# Altium PCB Potencia.PcbDoc
Units mm, origin at the board's own origin, x right, y up, seen from the top; angles counter-clockwise.
Board outline 128 x 103 mm, 2 copper layers (Top Layer, Bottom Layer); 32 components, 38 nets, 101 pads, 0 vias.
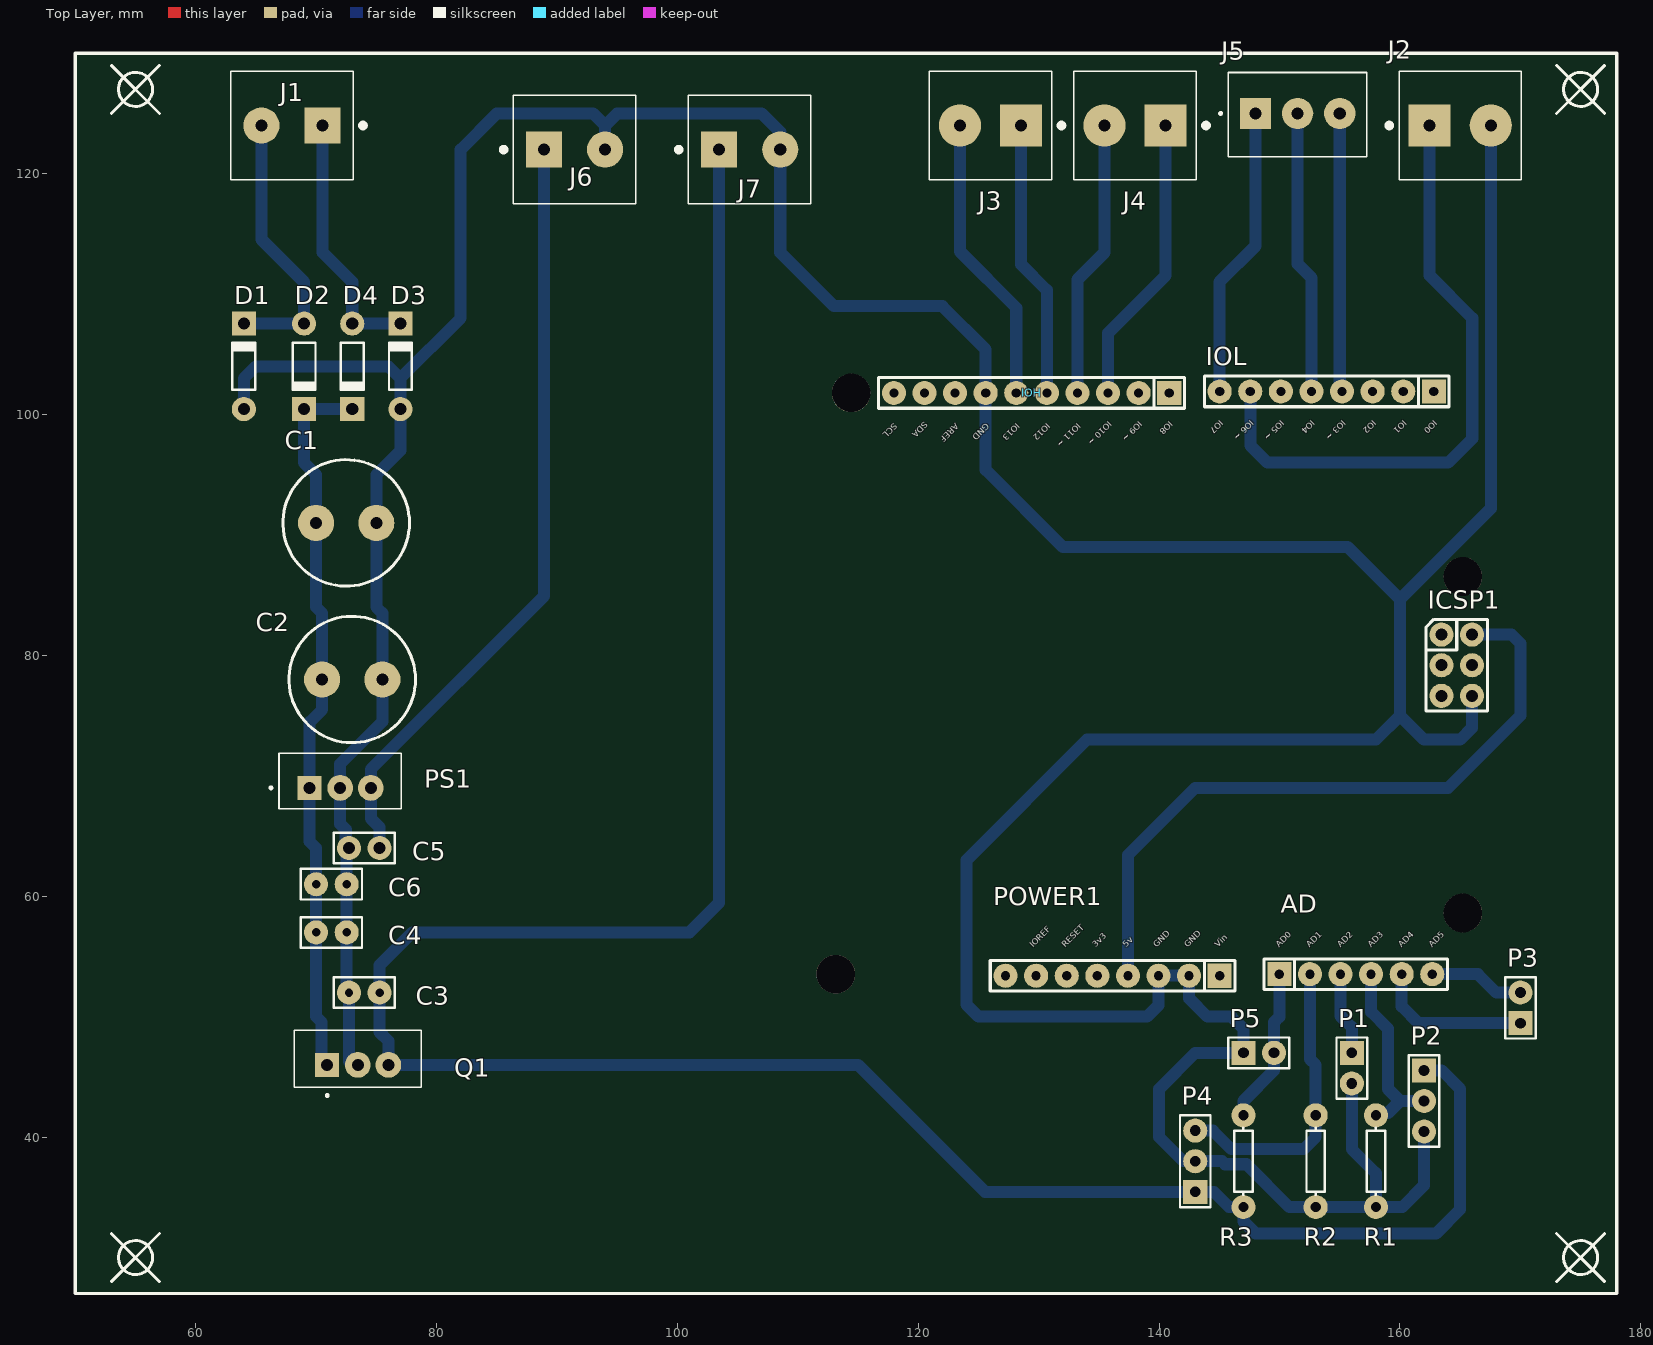
[diagram p0: Top Layer view]
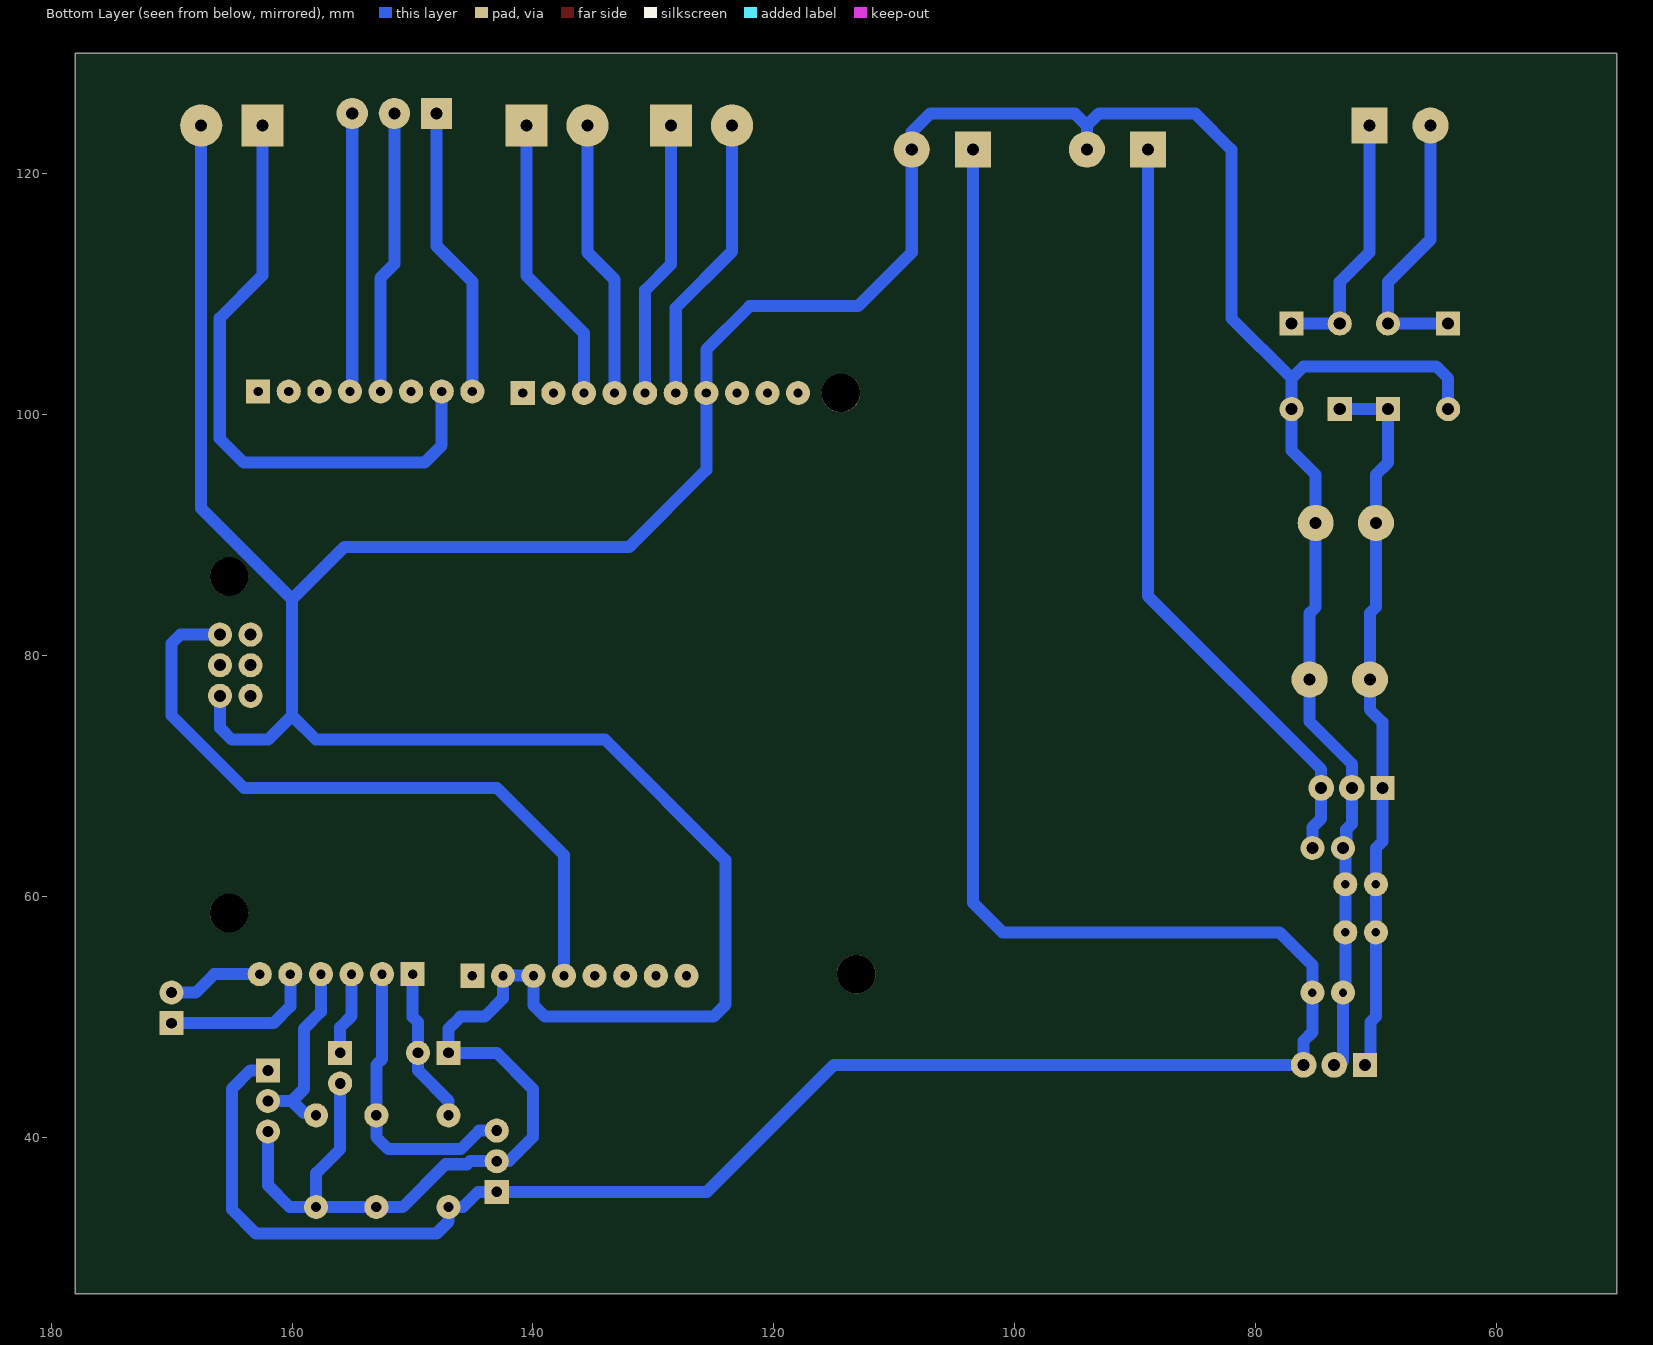
[diagram p1: Bottom Layer view, seen from below]

## Layer stack, top to bottom
Top Solder: solder mask 0.0102, Solder Resist, Dk 3.5
Top Layer: signal copper 0.0356
Dielectric 1: dielectric 0.32, FR-4, Dk 4.8
Bottom Layer: signal copper 0.0356
Bottom Solder: solder mask 0.0102, Solder Resist, Dk 3.5

## Board outline
50,27 178,27 178,130 50,130

## Design rules (kind name [scope] priority, off if disabled: settings)
Clearance [All] p1: gap=0.254 ignorepadtopadclearanceinfootprint=FALSE except(0: Arc-Hole Track-Hole SMDPad-Hole THPad-Hole Via-Hole Fill-Hole Poly-Hole Region-Hole Text-Hole)
PolygonConnect [All] p1: connectstyle=Relief reliefconductorwidth=0.254 reliefentries=4 polygonreliefangle="90 Angle" airgapwidth=0.254
RoutingVias [All] p1: holewidth=0.711 width=1.27 viastyle="Through Hole" minholewidth=0.711 minwidth=1.27 maxholewidth=0.711 maxwidth=1.27
SolderMaskExpansion [All] p1: expansion=0.102
Width [All] p1: maxlimit=1 minlimit=1 preferedwidth=1
30 further rules are at their usual default settings.

## Components (designator, comment, footprint, x,y, rotation, side; value= is the part's Value field where it differs from the comment)
AD "AD" "Header 6x1 8.5mm" 149.982,53.53 r0 top locked
C1 "Cap Pol1" RB5-10.5 72.5,91 r0 top value=100pF
C2 "Cap Pol1" RB5-10.5 73,78 r0 top value=100pF
C3 "Cap" RAD-0.1#1 74,52 r0 top value=100pF
C4 "Cap" RAD-0.1#1 71.27,57 r180 top value=100pF
C5 "Cap" RAD-0.1#2 74,64 r0 top value=100pF
C6 "Cap" RAD-0.1#1 71.27,61 r180 top value=100pF
D1 "Diode 1N914" DO-35 64,104 r90 top
D2 "Diode 1N914" DO-35 69,104 r270 top
D3 "Diode 1N914" DO-35 77,104 r90 top
D4 "Diode 1N914" DO-35 73,104 r270 top
ICSP1 "ICSP" ICSP 163.444,81.724 r0 top
IOH "IOH" "Header 10x1 8.5mm" 140.838,101.79 r180 top locked
IOL "IOL" "Header 8x1 8.5mm" 162.809,101.917 r180 top
J1 "282841-2" TE_282841-2#1 68,124 r180 top
J2 "282841-2" TE_282841-2#2 165,124 r0 top
J3 "282841-2" TE_282841-2#2 126,124 r180 top
J4 "282841-2" TE_282841-2#2 138,124 r180 top
J5 "1776275-3" TE_1776275-3 148,125 r0 top
J6 "282841-2" TE_282841-2#1 91.46,122 r0 top
J7 "282841-2" TE_282841-2#1 106,122 r0 top
P1 "Boton limpieza" HDR1X2 156,47 r270 top
P2 "Fin de carrera A" HDR1X3 162,45.54 r270 top
P3 "I2C" HDR1X2 170,49.46 r90 top
P4 "Fin de carrera B" HDR1X3 143,35.46 r90 top
P5 "Termistor" HDR1X2 147,47 r0 top
POWER1 "POWER_UNO" "Header 8x1 8.5mm" 145.029,53.403 r180 top
PS1 "LM7812" VREG_LM7812 72,69 r0 top
Q1 "LM7805CT/NOPB" TO254P1054X470X1955-3 73.46,46 r0 top
R1 "Res1" AXIAL-0.3 158,38 r90 top value=1K
R2 "Res1" AXIAL-0.3 153,38 r90 top value=1K
R3 "Res1" AXIAL-0.3 147,38 r90 top value=1K

## Footprints (in the part's own frame and the unit in brackets; to place one, negate y for a bottom-side part, rotate by r counter-clockwise, add the part's x,y. Pads: shape width x height; smd on the part's side, far side on the other; paste and mask are expansions set on the pad)
AXIAL-0.3 [mm] "Axial Device, Thru-Hole; 2 Leads; 0.3 in Pin Spacing"
  round 2 hole 0.85: 1(-3.81,0) 2(3.81,0)
  silkscreen extent -2.77,-0.76 2.77,0.76
DO-35 [mm] "Diode, Axial; Body 3.8 x 1.9 mm (LxDia. max), Lead Dia. 0.53 mm (max)"
  round 2 hole 1: 1(-3.55,0)
  rect 2x2 hole 1: 2(3.55,0)
  silkscreen extent -1.95,-0.95 2.05,0.95
HDR1X2 [mm] "Connector; Header; 2 Position"
  rect 2x2 hole 0.9: 1(0,0)
  round 2 hole 0.9: 2(2.54,0)
  silkscreen extent -1.27,-1.27 3.81,1.27
HDR1X3 [mm] "Connector; Header; 3 Position"
  rect 2x2 hole 0.9: 1(0,0)
  round 2 hole 0.9: 2(2.54,0) 3(5.08,0)
  silkscreen extent -1.27,-1.27 6.35,1.27
"Header 6x1 8.5mm" [mm] "Stackable 6 pin header"
  rect 2x2 hole 0.762: 1(0,0)
  round 2 hole 0.762: 2(2.54,0) 3(5.08,0) 4(7.62,0) 5(10.16,0) 6(12.7,0)
  silkscreen extent -1.27,-1.27 13.97,1.27, body extent -1.27,-1.27 13.97,1.27, height 8.5
"Header 8x1 8.5mm" [mm] "Stackable 8 pin header"
  rect 2x2 hole 0.762: 1(0,0)
  round 2 hole 0.762: 2(2.54,0) 3(5.08,0) 4(7.62,0) 5(10.16,0) 6(12.7,0) 7(15.24,0) 8(17.78,0)
  silkscreen extent -1.27,-1.27 19.05,1.27, body extent -1.27,-1.27 19.05,1.27, height 8.5
"Header 10x1 8.5mm" [mm] "Stackable 10 pin header"
  rect 2x2 hole 0.762: 1(0,0)
  round 2 hole 0.762: 2(2.54,0) 3(5.08,0) 4(7.62,0) 5(10.16,0) 6(12.7,0) 7(15.24,0) 8(17.78,0) 9(20.32,0) 10(22.86,0)
  silkscreen extent -1.27,-1.27 24.13,1.27, body extent -1.27,-1.27 24.13,1.27, height 8.5
ICSP [mm]
  round 2 hole 1: 1(0,0) 2(2.54,0) 3(0,-2.54) 4(2.54,-2.54) 5(0,-5.08) 6(2.54,-5.08)
  silkscreen extent -1.27,-6.35 3.81,1.27, body extent -1.27,-6.35 3.81,1.27, height 12.31
RAD-0.1#1 [mm] "Radial Cap, Thru-Hole; 2 Leads; 0.1 in Pin Spacing"
  round 2 hole 0.7: 1(-1.27,0) 2(1.27,0)
  silkscreen extent -2.54,-1.27 2.54,1.27
RAD-0.1#2 [mm] "Radial Cap, Thru-Hole; 2 Leads; 0.1 in Pin Spacing"
  round 2 hole 1: 1(-1.27,0) 2(1.27,0)
  silkscreen extent -2.54,-1.27 2.54,1.27
RB5-10.5 [mm] "Capacitor (Radial); 2 Leads"
  round 3 hole 1: 1(-2.5,0) 2(2.5,0)
  silkscreen extent -5.25,-5.25 5.25,5.25
TE_282841-2#1 [mm]
  rect 3x3 hole 1: 1(-2.54,0)
  round 3 hole 1: 2(2.54,0)
  silkscreen extent -6.09,-4.5 5.08,4.5
TE_282841-2#2 [mm]
  rect 3.5x3.5 hole 1: 1(-2.54,0)
  round 3.5 hole 1: 2(2.54,0)
  silkscreen extent -6.09,-4.5 5.08,4.5
TE_1776275-3 [mm]
  rect 2.6x2.6 hole 1: 1(0,0)
  round 2.6 hole 1: 2(3.5,0) 3(7,0)
  silkscreen extent -3,-3.6 9.25,3.4
TO254P1054X470X1955-3 [mm]
  rect 2x2 hole 1: 1(-2.54,0)
  round 2.14 hole 1: 2(0,0) 3(2.54,0)
  silkscreen extent -5.27,-2.64 5.27,2.86
VREG_LM7812 [mm]
  rect 2x2 hole 1: 1(-2.54,0)
  round 2.14 hole 1: 2(0,0) 3(2.54,0)
  silkscreen extent -5.85,-1.72 5.08,2.86

## Part data
AD: Supplier Part Number 1=2699089, Supplier 1=Arrow, Supplier 2=Digi-Key, Supplier 3=Arrow, Supplier 4=Arrow, Supplier Part Number 2=SAM1198-06-ND, Supplier Part Number 3=2699088, Supplier Part Number 4=2699075
C1 C2: "Polarized Capacitor (Radial)", LatestRevisionDate=17-Jul-2002, LatestRevisionNote="Re-released for DXP Platform.", PackageDescription="Polarized Capacitor (Radial); 2 Leads", PackageReference=RB7.6-15, Published=8-Jun-2000, Publisher="Altium Limited"
C3 C4 C5 C6: "Capacitor", LatestRevisionDate=17-Jul-2002, LatestRevisionNote="Re-released for DXP Platform.", PackageDescription="Radial Cap, Thru-Hole; 2 Leads; 0.3 in Pin Spacing", PackageReference=RAD-0.3, Published=8-Jun-2000, Publisher="Altium Limited"
D1 D2 D3 D4: "High Conductance Fast Diode", Code_JEDEC=DO-204-AH, ComponentLink1Description="Manufacturer Link", ComponentLink1URL=http://www.fairchildsemi.com/, ComponentLink2Description=Datasheet, ComponentLink2URL=http://www.fairchildsemi.com/ds/1N%2F1N4448.pdf, DatasheetVersion=1997, LatestRevisionDate=17-Jul-2002, LatestRevisionNote="Re-released for DXP Platform.", PackageDescription="Diode, Axial; Body 3.8 x 1.9 mm (LxDia. max), Lead Dia. 0.53 mm (max)", PackageReference=DO-35, Published=8-Jun-2000, Publisher="Altium Limited"
ICSP1: Supplier Part Number 1=2699117, Supplier 1=Arrow, Supplier 2=Arrow, Supplier 3=Digi-Key, Supplier 4=Arrow, Supplier 5=Digi-Key, Supplier Part Number 2=2699116, Supplier Part Number 3=SAM1185-06-ND, Supplier Part Number 4=2699091, Supplier Part Number 5=SAM1196-06-ND
IOH: Supplier Part Number 1=2698803S4475693N1004, Supplier 1=Arrow, Supplier 2=Digi-Key, Supplier 3=Arrow, Supplier Part Number 2=SAM1198-10-ND, Supplier Part Number 3=2698789
IOL POWER1: Supplier Part Number 1=SAM1198-08-ND, Supplier 1=Digi-Key, Supplier 2=Arrow, Supplier 3=Arrow, Supplier 4=Arrow, Supplier Part Number 2=2698939, Supplier Part Number 3=2698940, Supplier Part Number 4=2698925
J1 J2 J3 J4 J6 J7: "Conn Terminal Block 2 POS 5.08mm Solder ST Thru-Hole 17.5A/Contact", Package=None, Availability=Unavailable, EU_RoHS_Compliance="Compliant with Exemptions", MF="TE Connectivity", MP=282841-2, Price=None, SnapEDA_Link=https://www.snapeda.com/parts/282841-2/TE%20Connectivity%20AMP%20Connectors/view-part/434231/?ref=snap, TE_purchase_URL=https://www.te.com/usa-en/product-282841-2.html?te_bu=Cor&te_type=disp&te_campaign=seda_glo_cor-seda-global-disp-prtnr-fy19-seda-model-bom-cta_sma-317_1&elqCampaignId=32493
  J1: Comment_1=Transformador
  J2: Comment_1="Cama caliente"
  J3: Comment_1="Motoreductor A"
  J4: Comment_1="Motoreductor B"
  J6: Comment_1="salida de 12"
  J7: Comment_1="Salida 5"
J5: "Wire-To-Board Terminal Block, 3, 250 V, 7 A, 22 Awg, 14 Awg, 2 Mm", Package=None, Availability=Unavailable, Comment_1="Paso a paso", MF="TE Connectivity", MP=1776275-3, Price=None, SnapEDA_Link=https://www.snapeda.com/parts/1776275-3/TE%20Connectivity%20AMP%20Connectors/view-part/2779112/?ref=snap, TE_purchase_URL=https://www.te.com/usa-en/product-1776275-3.html?te_bu=Cor&te_type=disp&te_campaign=seda_glo_cor-seda-global-disp-prtnr-fy19-seda-model-bom-cta_sma-317_1&elqCampaignId=32493
P1 P3 P5: library part "Header 2", "Header, 2-Pin", LatestRevisionDate=17-Jul-2002, LatestRevisionNote="Re-released for DXP Platform.", Publisher="Altium Limited"
P2 P4: library part "Header 3", "Header, 3-Pin", LatestRevisionDate=17-Jul-2002, LatestRevisionNote="Re-released for DXP Platform.", Publisher="Altium Limited"
PS1: "Linear Voltage Regulator IC 1 Output 1.5A DDPAK/TO-263-3", Package="TO-220 Texas Instruments", Availability=Unavailable, BuyPart=https://www.snapeda.com/parts/LM7812/Texas%20Instruments/view-part/2755251/?ref=eda, MF="Texas Instruments", MP=LM7812, Price=None, SnapEDA_Link=https://www.snapeda.com/parts/LM7812/Texas%20Instruments/view-part/2755251/?ref=snap
Q1: "1.5-A, 30-V, linear voltage regulator 3-TO-220 0 to 125", Package="TO-220-3 Texas Instruments", Availability=Unavailable, MF="Texas Instruments", MP=LM7805CT/NOPB, Price=None, SnapEDA_Link=https://www.snapeda.com/parts/LM7805CT/NOPB/Texas%20Instruments/view-part/6627/?ref=snap, Texas_Instruments-Purchase-URL=https://snapeda.com/shop?store=Texas+Instruments&id=6627
R1 R2 R3: "Resistor", LatestRevisionDate=17-Jul-2002, LatestRevisionNote="Re-released for DXP Platform.", PackageDescription="Axial Device, Thru-Hole; 2 Leads; 0.3 in Pin Spacing", PackageReference=AXIAL-0.3, Published=8-Jun-2000, Publisher="Altium Limited"

## Free pads (board coordinates)
  round 3.2 hole 3.2: 0(113.152,53.53) 0(114.422,101.79) 0(165.222,58.61) 0(165.222,86.55)

## Nets (pads, with @x,y where several pads share a name; then routed paths per layer and width w, separated by ;. In a path a pad name is that pad's centre, name@x,y a point inside that pad or via, vN(x,y) a via of type N, cw(c..) or ccw(c..) an arc to the next point about the centre after c; other vN are vias at no path point)
3V3: POWER1.5
5V: ICSP1.2 POWER1.4 | length 57.7
  Bottom Layer w1: POWER1.4 137.409,63.409 143,69 164,69 170,75 170,81 169.276,81.724 ICSP1.2
+5V: C3.2 J7.1 P2.1 P4.1 Q1.3 R3.1 | length 211.4
  Bottom Layer w1: J7.1 103.46,59.46 101,57 78,57 75.27,54.27 C3.2 75.27,48.73 76,48 Q1.3 115,46 125.54,35.46 P4.1 144.54,35.46 145.81,34.19 R3.1 147,33 148,32 163,32 165,34 165,44 163.46,45.54 P2.1
+12V: C5.2 J6.1 PS1.3 | length 64.3
  Bottom Layer w1: C5.2 75.27,65.73 74.54,66.46 PS1.3 74.54,70.54 88.92,84.92 J6.1
AD0: AD.1 P5.2 R3.2 | length 13
  Bottom Layer w1: R3.2 147,43 149.54,45.54 P5.2 149.54,49.54 149.982,49.982 AD.1
AD1: AD.2 P4.3 R2.2 | length 24.8
  Bottom Layer w1: P4.3 144.46,40.54 146,39 152,39 153,40 R2.2 153,46 152.522,46.478 AD.2
AD2: AD.3 P1.1 | length 6.9
  Bottom Layer w1: AD.3 155.062,50.062 156,49.124 P1.1
AD3: AD.4 P2.2 R1.2 | length 16
  Bottom Layer w1: AD.4 157.602,50.398 159,49 159,44 160,43 ; R1.2 158.19,42 159,42 160,43 ; P2.2 160,43
AD4: AD.5 P3.1 | length 13.1
  Bottom Layer w1: AD.5 160.142,50.858 161.54,49.46 P3.1
AD5: AD.6 P3.2 | length 8
  Bottom Layer w1: AD.6 166.47,53.53 168,52 P3.2
AREF: IOH.8
GND: C1.2 C2.2 C3.1 C4.1 C5.1 C6.1 D1.1 D3.1 ICSP1.6 IOH.7 J2.2 J6.2 J7.2 P1.2 P2.3 P4.2 P5.1 POWER1.2 POWER1.3 PS1.2 Q1.2 R1.1 R2.1 | length 407
  Bottom Layer w1: D1.1 64,103 65,104 76,104 77,103 ; Q1.2@73,46 72.73,46.27 C3.1 72.54,52.19 C4.1 C6.1 72.54,63.92 72.46,64 72.46,65.54 72,66 PS1.2 72,71 75.5,74.5 C2.2 75.5,83.5 75,84 C1.2 75,95 77,97 D3.1 77,103 ; J6.2 94,124 ; P1.2 156,39 158,37 R1.1 ; P2.3 162,36 160.19,34.19 R1.1 ; ICSP1.6 165.984,73.984 165,73 162,73 160,75 ; J2.2 167.54,92.197 160,84.657 ; 77,103 82,108 82,122 85,125 93,125 94,124 ; 94,124 95,125 107,125 108.54,123.46 J7.2 108.54,113.46 113,109 122,109 125.598,105.402 IOH.7 125.598,95.402 132,89 155.657,89 160,84.657 ; R1.1 R2.1 150.81,34.19 147.254,37.746 145.481,37.746 145.227,38 P4.2 142,38 140,40 140,44 143,47 P5.1 147,49 146,50 144,50 142.489,51.511 POWER1.2 POWER1.3 139.949,50.949 139,50 125,50 124,51 124,63 134,73 158,73 160,75 ; 160,75 160,84.657
IO0: IOL.1
IO1: IOL.2
IO2: IOL.3
IO3: IOL.4 J5.3 | length 23.2
  Bottom Layer w1: J5.3 155,102.106 IOL.4
IO4: IOL.5 J5.2 | length 23.6
  Bottom Layer w1: J5.2 151.5,112.5 152.649,111.351 IOL.5
IO5: IOL.6
IO6: IOL.7 J2.1 | length 51.8
  Bottom Layer w1: IOL.7 147.569,97.431 149,96 164,96 166,98 166,108 162.46,111.54 J2.1
IO7: IOL.8 J5.1 | length 24.3
  Bottom Layer w1: IOL.8 145,101.946 145,111 148,114 J5.1
IO8: IOH.1
IO9: IOH.2
IO10: IOH.3 J4.1 | length 24.2
  Bottom Layer w1: IOH.3 135.758,106.758 140.54,111.54 J4.1
IO11: IOH.4 J4.2 | length 23.1
  Bottom Layer w1: IOH.4 133.218,111.218 135.46,113.46 J4.2
IO12: IOH.5 J3.1 | length 23.1
  Bottom Layer w1: J3.1 128.54,112.46 130.678,110.322 IOH.5
IO13: IOH.6 J3.2 | length 24.1
  Bottom Layer w1: J3.2 123.46,113.54 128.138,108.862 IOH.6
IOREF: POWER1.7
MISO: ICSP1.1
MOSI: ICSP1.4
NetD1_2: D1.2 D2.1 J1.2 | length 22.9
  Bottom Layer w1: D1.2 D2.1 69,111 65.46,114.54 J1.2
NetD3_2: D3.2 D4.1 J1.1 | length 21.5
  Bottom Layer w1: J1.1 70.54,113.46 73,111 D4.1 D3.2
Positivo: C1.1 C2.1 C4.2 C6.2 D2.2 D4.2 PS1.1 Q1.1 | length 59.9
  Bottom Layer w1: Q1.1@70.46,46 70.46,49.54 70,50 C4.2 C6.2 70,64 69.46,64.54 PS1.1 69.46,74.46 70.5,75.5 C2.1 70.5,83.5 70,84 C1.1 70,95 69,96 D2.2 D4.2
RESET: ICSP1.5
"RESET A": POWER1.6
SCK: ICSP1.3
SCL: IOH.10
SDA: IOH.9
Vin: POWER1.1
pads on no net: POWER1.8

## Silkscreen, mask and mechanical layers (free items; w line width, h text height)
Top Overlay:
  circle w0.254: c175,127 r1.414
  circle w0.254: c175,30 r1.414
  circle w0.254: c55,30 r1.414
  circle w0.254: c55,127 r1.414
  lines w0.254: 53,28 57,32 ; 53,32 57,28 ; 53,125 57,129 ; 53,129 57,125 ; 173,28 177,32 ; 173,32 177,28 ; 173,125 177,129 ; 173,129 177,125 ; 50,27 50,130 178,130 178,27 50,27
  text "IO7" at 145.029,99.578 h0.51 r225
  text "IO6 ~" at 147.569,99.578 h0.51 r225
  text "IO5 ~" at 150.109,99.578 h0.51 r225
  text "IO4" at 152.649,99.578 h0.51 r225
  text "IO3 ~" at 155.189,99.578 h0.51 r225
  text "IO2" at 157.729,99.578 h0.51 r225
  text "IO1" at 160.269,99.578 h0.51 r225
  text "IO0" at 162.809,99.578 h0.51 r225
  text "IO10 ~" at 135.758,99.504 h0.51 r225
  text "IO9 ~" at 138.298,99.504 h0.51 r225
  text "IO8" at 140.838,99.504 h0.51 r225
  text "SDA" at 120.518,99.451 h0.51 r225
  text "SCL" at 117.978,99.324 h0.51 r225
  text "AREF" at 123.058,99.324 h0.51 r225
  text "GND" at 125.598,99.324 h0.51 r225
  text "IO13" at 128.138,99.324 h0.51 r225
  text "IO12" at 130.678,99.324 h0.51 r225
  text "IO11 ~" at 133.218,99.324 h0.51 r225
  text "IOREF" at 129.535,55.742 h0.51 r45
  text "RESET" at 132.202,55.742 h0.51 r45
  text "3v3" at 134.742,55.742 h0.51 r45
  text "5v" at 137.282,55.742 h0.51 r45
  text "GND" at 139.822,55.742 h0.51 r45
  text "GND" at 142.362,55.742 h0.51 r45
  text "Vin" at 144.902,55.742 h0.51 r45
  text "AD0" at 149.982,55.742 h0.51 r45
  text "AD1" at 152.522,55.742 h0.51 r45
  text "AD2" at 155.062,55.742 h0.51 r45
  text "AD3" at 157.602,55.742 h0.51 r45
  text "AD4" at 160.142,55.742 h0.51 r45
  text "AD5" at 162.682,55.742 h0.51 r45
Mechanical 1:
  circle w0.127: c165.222,86.55 r1.6
  circle w0.127: c113.152,53.53 r1.6
  circle w0.127: c165.222,58.61 r1.6
  circle w0.127: c114.422,101.79 r1.6
  lines w0.127: 99.182,50.99 165.222,50.99 165.222,52.26 167.762,54.8 167.762,89.09 165.222,91.63 165.222,101.79 162.682,104.33 99.182,104.33 99.182,50.99